# EAGLE board final_commit (EAGLE 9.3.2)
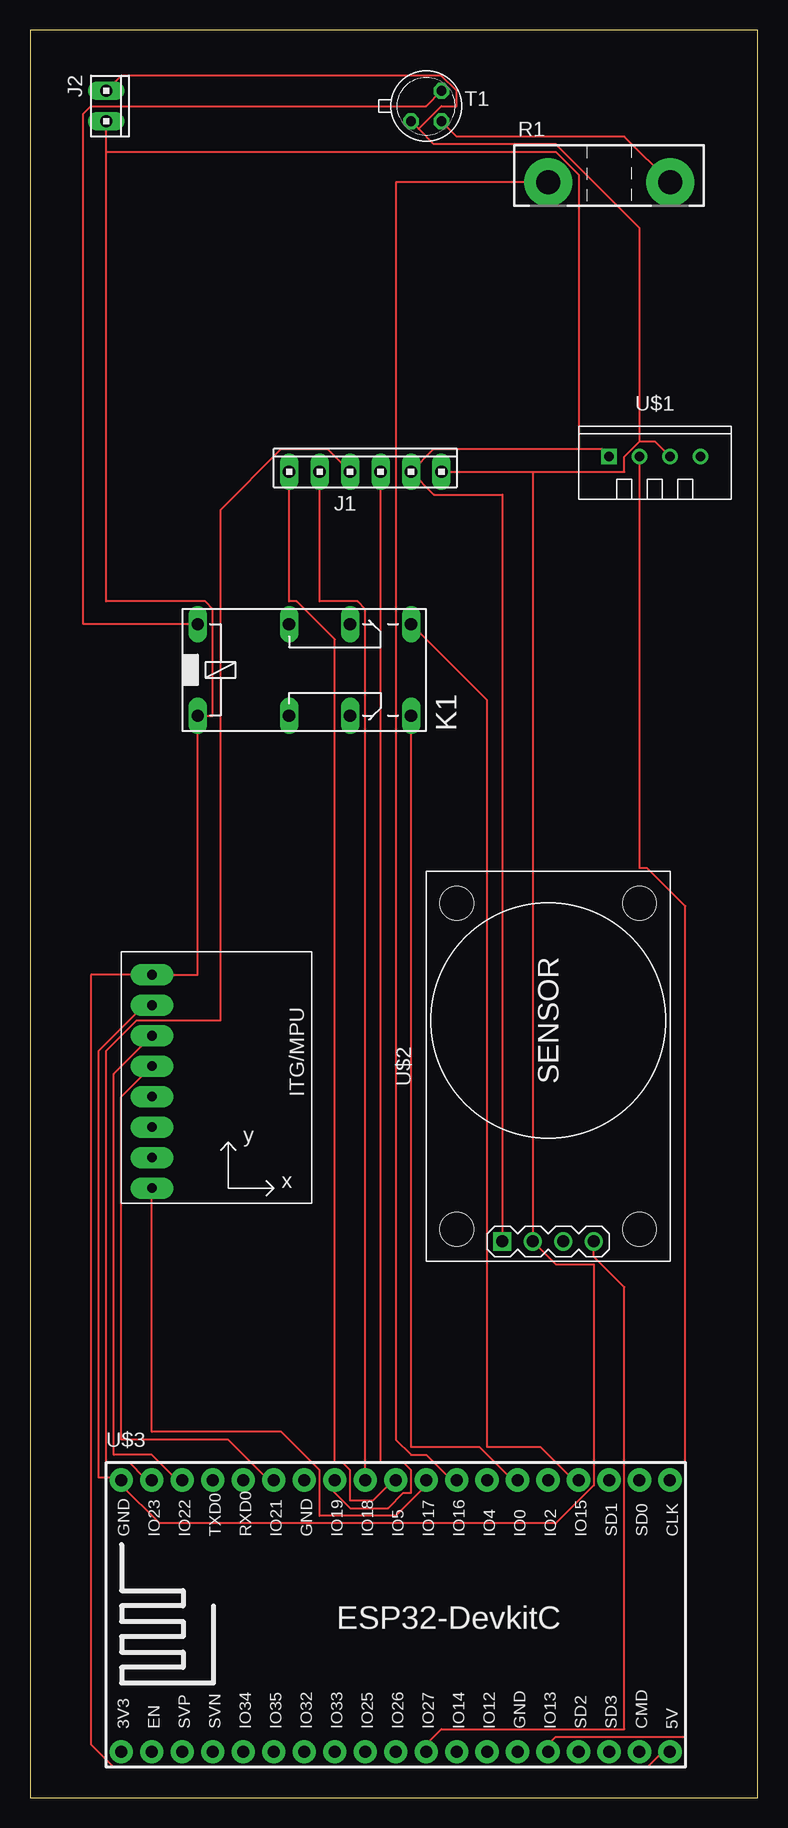
[diagram p0: board, top side]

Size 60.63 x 147.31 mm. Coordinates in mm from the lower left corner, seen from the top.
Outline: 0,0 60.63,0 60.63,147.31 0,147.31 0,0
Copper layers (1*16): Top 0.035mm / dielectric 1.5mm / Bottom 0.035mm
Design rules "default": minimum track width 6mil, minimum drill 0.35mm, track to track 6mil, track to pad 6mil, pad to pad 6mil, via to via 6mil, smd to smd 6mil, copper to edge 40mil, drill to drill 6mil, minimum pad ring 10mil, minimum via ring 8mil, stop-mask expansion 4mil, vias tented up to drill 0mil, thermal gap 10mil

## Footprints (pad centres in the part's own frame; a part is rotated, then mirrored left to right if it is on the bottom)
10X06MTA = drill 1.016 long: 1 6.35,0; 2 3.81,0; 3 1.27,0; 4 -1.27,0; 5 -3.81,0; 6 -6.35,0
10X02MTA = drill 1.016 long: 1 1.27,0; 2 -1.27,0
351 = drill 1.016 long: 1 -3.81,-3.81; 16 -3.81,3.81; O1 8.89,-3.81; O2 8.89,3.81; P1 3.81,-3.81; P2 3.81,3.81; S1 13.97,-3.81; S2 13.97,3.81
TO-247-2V = drill 2 pad 4: 1 -5.08,0; 2 5.08,0
TO18 = drill 0.813 octagon: 1 -1.27,-1.27; 2 1.27,-1.27; 3 1.27,1.27
GY-521 = drill 0.8 pad 1.778 long: ADO -8.89,-6.35; GND -8.89,6.35; INT -8.89,-8.89; SCL -8.89,3.81; SDA -8.89,1.27; VCC -8.89,8.89; XCL -8.89,-3.81; XDA -8.89,-1.27
TEMP-HUM-SENSOR-DHT11 = drill 0.8 square: 1 -3.81,0 | drill 0.8: 2 -1.27,0; 3 1.27,0; 4 3.81,0
GAS-SENSOR-MQ2 = drill 1 square: 1 -14.605,3.81 | drill 1: 2 -14.605,1.27; 3 -14.605,-1.27; 4 -14.605,-3.81 | hole 2.8: -13.589,7.62; -13.589,-7.62; 13.589,-7.62; 13.589,7.62
ESP32-DEVKITC = drill 1 pad 1.93: 1 -22.87,-11.42; 2 -20.33,-11.42; 3 -17.79,-11.42; 4 -15.25,-11.42; 5 -12.71,-11.42; 6 -10.17,-11.42; 7 -7.63,-11.42; 8 -5.09,-11.42; 9 -2.55,-11.42; 10 -0.01,-11.42; 11 2.53,-11.42; 12 5.07,-11.42; 13 7.61,-11.42; 14 10.15,-11.42; 15 12.69,-11.42; 16 15.23,-11.42; 17 17.77,-11.42; 18 20.31,-11.42; 19 22.85,-11.42; 20 22.85,11.23; 21 20.31,11.23; 22 17.77,11.23; 23 15.23,11.23; 24 12.69,11.23; 25 10.15,11.23; 26 7.61,11.23; 27 5.07,11.23; 28 2.53,11.23; 29 -0.01,11.23; 30 -2.55,11.23; 31 -5.09,11.23; 32 -7.63,11.23; 33 -10.17,11.23; 34 -12.71,11.23; 35 -15.25,11.23; 36 -17.79,11.23; 37 -20.33,11.23; 38 -22.87,11.23

## Placement (x,y rotation side)
J1  [10X06MTA]  27.94,110.49 0 top
J2  [10X02MTA]  6.35,140.97 270 top
K1  351  [351]  17.78,93.98 0 top
R1  [TO-247-2V]  48.26,134.62 0 top
T1  2N2222  [TO18]  33.02,140.97 0 top
U2  GY-521MPU6050  [GY-521]  19.05,59.69 0 top
U$1  TEMP-HUM-SENSOR-DHT11  [TEMP-HUM-SENSOR-DHT11]  52.07,111.76 0 top
U$2  GAS-SENSOR-MQ2  [GAS-SENSOR-MQ2]  43.18,60.96 90 top
U$3  ESP32DEVKITC  [ESP32-DEVKITC]  30.48,15.24 0 top

## Library data of the parts
J1 J2 = con-amp
K1 = relay; OC_FARNELL: unknown; OC_NEWARK: unknown
R1 = resistor-power; OC_FARNELL: unknown; OC_NEWARK: unknown
T1 = transistor
U2 = gy-521
U$1 U$2 = diy-modules
U$3 = ESP32-DEVKITC

## Nets
GND: U$1.4
N$1: J1.6 U$3.29
N$2: J1.5 U$3.30
N$3: J1.4 U$3.37
N$4: J1.3 U$3.31
N$5: U2.INT U$3.28
N$6: U2.SCL U$3.36
N$7: U2.SDA U$3.33
N$8: U$1.2 U$3.15
N$9: U$2.4 U$3.11
N$10: R1.2 T1.2
N$11: R1.1 U$3.27
N$12: K1.16 T1.3
N$13: K1.S1 U$3.25
N$14: K1.S2 U$3.23
N$15: J1.1 J2.2 T1.1 U2.GND U$1.3 U$2.2 U$3.38
N$17: J1.2 J2.1 K1.1 U2.VCC U$1.1 U$2.1 U$3.19

## Tracks (layer width: path | path; a pad name or v marks a point on that pad's centre or on a via)
N$1
  Top 0.152: J1.6 21.59,99.69 22.23,99.69 25.4,96.52 25.4,27.94 26.04,27.94 26.67,27.3 26.67,24.77 28.57,24.77 29.84,26.04 U$3.29
N$2
  Top 0.152: J1.5 24.13,99.69 27.3,99.69 27.94,99.06 27.94,26.67 U$3.30
N$3
  Top 0.152: J1.4 24.77,112.39 20.95,112.39 15.88,107.31 15.88,64.77 8.89,64.77 6.35,62.23 6.35,27.94 8.26,27.94 9.53,26.67 U$3.37
N$4
  Top 0.152: J1.3 29.21,27.94 31.11,27.94 31.75,27.3 31.75,25.4 31.11,25.4 29.84,24.13 26.67,24.13 24.77,26.04 U$3.31
N$5
  Top 0.152: U2.INT 10.16,30.48 20.95,30.48 24.13,27.3 24.13,23.5 30.48,23.5 33.02,26.04 U$3.28
N$6
  Top 0.152: U2.SCL 6.99,60.33 6.99,28.57 10.16,28.57 12.06,26.67 U$3.36
N$7
  Top 0.152: U2.SDA 7.62,58.42 7.62,29.84 16.51,29.84 19.68,26.67 U$3.33
N$8
  Top 0.152: U$1.2 50.8,77.47 51.44,77.47 54.61,74.3 54.61,5.08 43.81,5.08 43.18,4.45 U$3.15
N$9
  Top 0.152: U$2.4 46.99,45.09 49.53,42.55 49.53,5.71 34.29,5.71 33.02,4.45 U$3.11
N$10
  Top 0.152: T1.2 35.56,138.43 49.53,138.43 R1.2
N$11
  Top 0.152: R1.1 30.48,134.62 30.48,29.84 31.75,28.57 33.02,28.57 34.92,26.67 U$3.27
N$12
  Top 0.152: T1.3 33.02,140.97 5.08,140.97 4.45,140.34 4.45,97.79 K1.16
N$13
  Top 0.152: K1.S1 31.75,29.21 37.47,29.21 40.01,26.67 U$3.25
N$14
  Top 0.152: K1.S2 38.1,91.44 38.1,29.21 42.55,29.21 45.09,26.67 U$3.23
N$15
  Top 0.152: U2.GND 9.53,65.41 8.89,65.41 5.71,62.23 5.71,26.67 6.99,26.67 U$3.38 7.62,26.04 10.79,22.86 43.81,22.86 46.99,26.04 46.99,44.45 43.81,44.45 U$2.2 41.91,110.49 | U$1.3 52.07,113.03 50.8,113.03 | 50.8,113.03 49.53,111.76 49.53,110.49 41.91,110.49 | J1.1 41.91,110.49 | 32.38,139.06 33.66,137.79 43.81,137.79 50.8,130.81 50.8,113.03 | 32.38,139.06 T1.1 | J2.2 7.62,143.51 34.29,143.51 35.56,142.24 35.56,140.97 34.29,140.97 32.38,139.06
N$17
  Top 0.152: U$1.1 47.62,112.39 45.72,112.39 | 45.72,112.39 33.66,112.39 J1.2 33.66,108.58 39.37,108.58 U$2.1 | 6.35,137.16 6.35,99.69 14.61,99.69 15.24,99.06 15.24,90.17 K1.1 13.97,68.58 U2.VCC 5.08,68.58 5.08,4.45 6.99,2.54 51.44,2.54 52.7,3.81 U$3.19 | 6.35,137.16 J2.1 | 45.72,112.39 45.72,135.25 43.81,137.16 6.35,137.16